# EAGLE board Ferduino_RFM12b_Arduino_Nano (EAGLE 6.4)
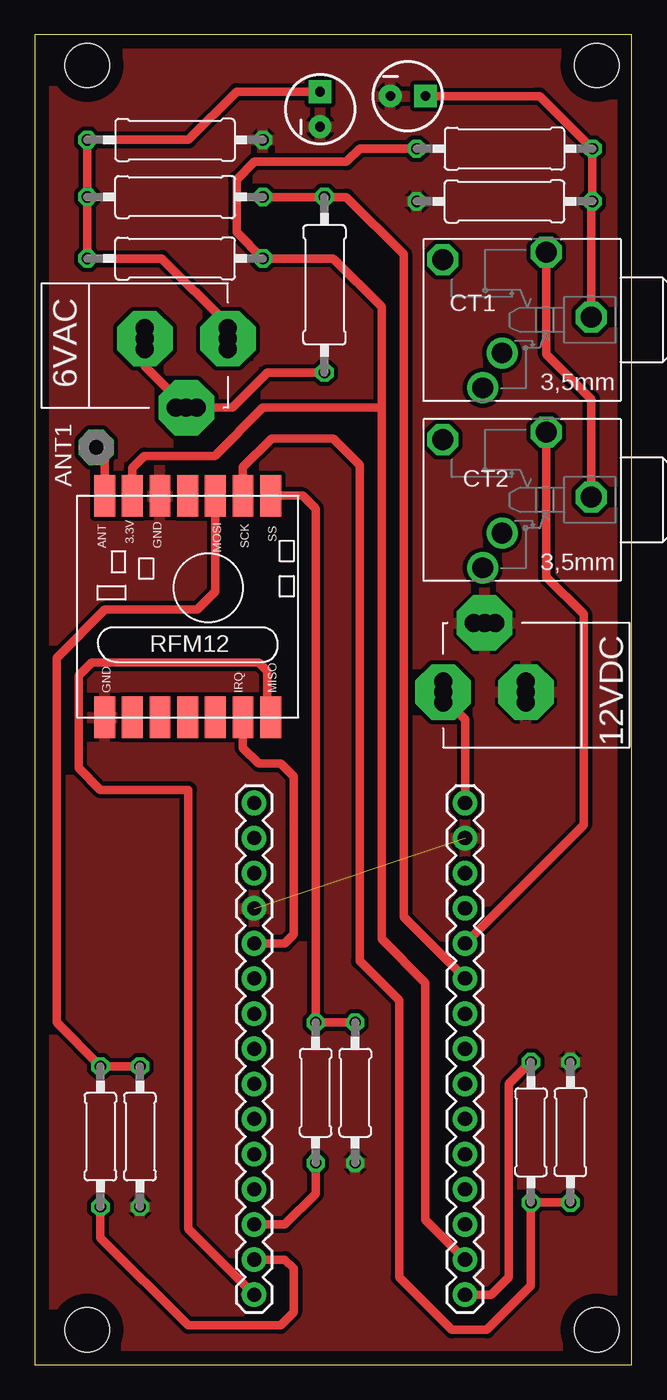
[diagram p0: board, top side]

Size 43.18 x 96.2 mm. Coordinates in mm from the lower left corner, seen from the top.
Outline: 0,0 43.18,0 43.18,96.2 0,96.2 0,0
Copper layers (1*16): Top 0.035mm / dielectric 1.5mm / Bottom 0.035mm
Design rules "default *": minimum track width 10mil, minimum drill 24mil, track to track 10mil, track to pad 10mil, pad to pad 10mil, via to via 10mil, smd to smd 10mil, copper to edge 40mil, drill to drill 10mil, minimum pad ring 10mil, minimum via ring 8mil, stop-mask expansion 10mil, vias tented up to drill 0mil, thermal gap 10mil
Net classes: 0 default: width 0.203 mm, drill 0.305 mm, clearance 0.203 mm
Holes 3.2 mm at 40.64,93.98 3.81,93.98 3.81,2.54 40.64,2.54

## Footprints (pad centres in the part's own frame; a part is rotated, then mirrored left to right if it is on the bottom)
POWERSUPPLY_DC-21MM = drill 1.3 pad 4 octagon: 1 -5.08,-3.353; 2 -0.076,-6.35; 3 -0.076,-0.356 | drill 1.3: 4 -5.08,-4.115; 5 -5.08,-2.591; 6 -0.838,-0.356; 7 0.686,-0.356; 8 -0.838,-6.35; 9 0.686,-6.35
PAD-01 = drill 1.321 pad 2.54 octagon: 1 0,0
CPOL-RADIAL-10UF-25V = drill 0.7 pad 1.651 square: 1 1.27,0 | drill 0.7 pad 1.651: 2 -1.27,0
PG203J = drill 1.499 octagon: 1 -5.004,-0.203; 4 5.74,-4.369; 5 -1.753,-4.902 | drill 1.499: 2 2.845,4.902; 3 1.448,2.388
1X15 = drill 1.016 pad 1.778: 1 0,0; 2 2.54,0; 3 5.08,0; 4 7.62,0; 5 10.16,0; 6 12.7,0; 7 15.24,0; 8 17.78,0; 9 20.32,0; 10 22.86,0; 11 25.4,0; 12 27.94,0; 13 30.48,0; 14 33.02,0; 15 35.56,0
0309/12 = drill 0.813 octagon: 1 -6.35,0; 2 6.35,0
0207/10 = drill 0.813 octagon: 1 -5.08,0; 2 5.08,0
RFM12 = smd 1.5 x 3: 3 3.54,-10; 3.3V -2.46,6; 4 1.54,-10; 5 -0.46,-10; 6 -2.46,-10; 11 1.54,6; ANT -4.46,6; GND -0.46,6; GND1 -4.46,-10; IRQ 5.54,-10; MISO 7.54,-10; MOSI 3.54,6; SCK 5.54,6; SS 7.54,6

## Placement (x,y rotation side)
6VAC  POWERSUPPLY_DC21MMX  [POWERSUPPLY_DC-21MM]  7.62,74.3 90 top
12VDC  POWERSUPPLY_DC21MMX  [POWERSUPPLY_DC-21MM]  35.88,48.58 270 top
ANT1  RF  [PAD-01]  4.45,66.36 0 top
C1  10uF  [CPOL-RADIAL-10UF-25V]  26.99,91.76 0 top
C2  10uF  [CPOL-RADIAL-10UF-25V]  20.64,90.81 90 top
CT1  PG203J  [PG203J]  35.24,75.56 180 top
CT2  PG203J  [PG203J]  35.24,62.55 180 top
JP1  M15  [1X15]  15.88,5.08 90 top
JP2  M15  [1X15]  31.11,5.08 90 top
R1  10k  [0309/12]  33.97,87.95 180 top
R2  10k  [0309/12]  33.97,84.14 0 top
R3  100k  [0309/12]  20.95,78.11 90 top
R4  10k  [0309/12]  10.16,84.45 0 top
R5  10k  [0309/12]  10.16,88.58 180 top
R6  10k  [0309/12]  10.16,80.01 0 top
R7  10k  [0207/10]  23.18,19.68 270 top
R8  4k7  [0207/10]  20.32,19.68 270 top
R9  4k7  [0207/10]  35.88,16.83 270 top
R10  10k  [0207/10]  38.73,16.83 90 top
R11  4k7  [0207/10]  4.76,16.51 90 top
R12  10k  [0207/10]  7.62,16.51 90 top
U$1  RFM12_SMDSMD  [RFM12]  9.53,56.83 0 top

## Library data of the parts
6VAC 12VDC = SmartPrj
ANT1 = discrete
C1 C2 = SparkFun-Passives
CT1 CT2 = con-hirschmann; OC_FARNELL: unknown; OC_NEWARK: unknown
JP1 JP2 = SparkFun
R1-R12 = rcl
U$1 = rfm_12

## Nets
3.3V: JP2.2 R1.2 R6.2 U$1.3.3V
5V: JP2.12
12V: 12VDC.2 JP2.15
A0: JP2.4
A1: JP2.5
A2: JP2.6
A3: JP2.7
A4: JP2.8
A5: JP2.9
A6: JP2.10 R3.2 R4.2
A7: CT2.5 JP2.11
AC1: 6VAC.1 6VAC.3 R3.1
AC2: 6VAC.2 C2.1 R4.1 R5.2 R6.1
D2/INT: JP1.11 U$1.IRQ
D3: JP1.10
D4: JP1.9
D5: JP1.8
D6: JP1.7
D7: JP1.6
D8: JP1.5
D9: JP1.4
D10/SS: JP1.3 R8.2
D11/MOSI: JP1.2 R11.1
D12/MISO: JP1.1 U$1.MISO
D13/SCK: JP2.1 R9.1
GND: 12VDC.1 12VDC.3 C1.2 C2.2 JP1.12 JP2.14 R2.1 R5.1 R7.2 R10.2 R12.1 U$1.GND U$1.GND1
N$1: CT1.5 CT2.1
N$2: ANT1.1 U$1.ANT
N$3: C1.1 CT1.1 R1.1 R2.2
N$4: R9.2 R10.1 U$1.SCK
N$5: R11.2 R12.2 U$1.MOSI
N$6: R7.1 R8.1 U$1.SS
REF: JP2.3
RST1: JP1.13
RST2: JP2.13
RX: JP1.14
TX: JP1.15

## Tracks (layer width: path | path; a pad name or v marks a point on that pad's centre or on a via)
3.3V
  Top 0.61: R1.2 23.5,87.95 22.54,87 15.88,87 14.61,85.72 14.61,81.92 R6.2 21.59,80.01 25.08,76.52 25.08,69.22 | U$1.3.3V 7.07,64.85 7.94,65.72 13.02,65.72 16.51,69.22 23.5,69.22 25.08,69.22 | 25.08,69.22 25.08,30.8 28.26,27.62 28.26,10.48 JP2.2
12V
  Top 0.406: 12VDC.2 29.53,48.26
  Top 0.61: 29.53,48.26 31.11,46.67 JP2.15
A6
  Top 0.61: JP2.10 26.67,32.38 26.67,80.33 22.54,84.45 R3.2 R4.2
A7
  Top 0.61: CT2.5 36.99,56.98 39.69,54.29 39.69,39.05 JP2.11
AC1
  Top 0.61: 6VAC.3 7.98,72.21 6VAC.1 14.29,69.22 16.83,71.75 R3.1
AC2
  Top 0.61: C2.1 14.61,92.08 11.11,88.58 R5.2 R4.1 R6.1 9.21,80.01 13.97,75.25 6VAC.2
D2/INT
  Top 0.61: U$1.IRQ 15.06,44.62 16.19,43.5 17.78,43.5 18.73,42.55 18.73,31.11 18.1,30.48 JP1.11
D10/SS
  Top 0.61: JP1.3 18.1,10.16 20.32,12.38 R8.2
D11/MOSI
  Top 0.61: R11.1 4.76,9.21 11.11,2.86 17.78,2.86 18.73,3.81 18.73,6.99 18.1,7.62 JP1.2
D12/MISO
  Top 0.61: 15.24,5.08 JP1.1 11.11,9.84 11.11,41.59 4.76,41.59 3.17,43.18 3.17,49.85 4.13,50.8 16.19,50.8 16.83,50.16 16.83,47.07 U$1.MISO
D13/SCK
  Top 0.61: JP2.1 33.02,5.08 34.29,6.35 34.29,20.32 R9.1
GND  (1 unrouted)
  pour Top (isolate 0.305): 0,0 43.18,0 43.18,96.2 0,96.2
N$1
  Top 0.61: CT2.1 40.25,69.85 37.15,72.95 36.99,73.1 CT1.5
N$2
  Top 0.61: 5.08,62.85 U$1.ANT 5.08,62.85 | ANT1.1 5.08,66.36 5.08,62.85
N$3
  Top 0.61: C1.1 36.2,91.76 36.51,91.76 R1.1 R2.2 40.25,84.06 CT1.1
N$4
  Top 0.61: U$1.SCK 15.06,64.91 17.14,66.99 21.59,66.99 23.5,65.09 23.5,29.21 26.35,26.35 26.35,6.35 30.16,2.54 32.7,2.54 35.88,5.71 R9.2 R10.1
N$5
  Top 0.61: R12.2 R11.2 1.59,24.77 1.59,51.12 5.08,54.61 11.75,54.61 13.06,55.93 U$1.MOSI
N$6
  Top 0.61: R7.1 R8.1 20.32,61.91 19.37,62.87 17.1,62.87 U$1.SS